# Altium PCB PCB1.PcbDoc
Units mm, origin at the board's own origin, x right, y up, seen from the top; angles counter-clockwise.
Board outline 76.2 x 50.8 mm, 2 copper layers (Top Layer, Bottom Layer), stack 1.534 mm thick; 36 components, 26 nets, 115 pads, 0 vias.
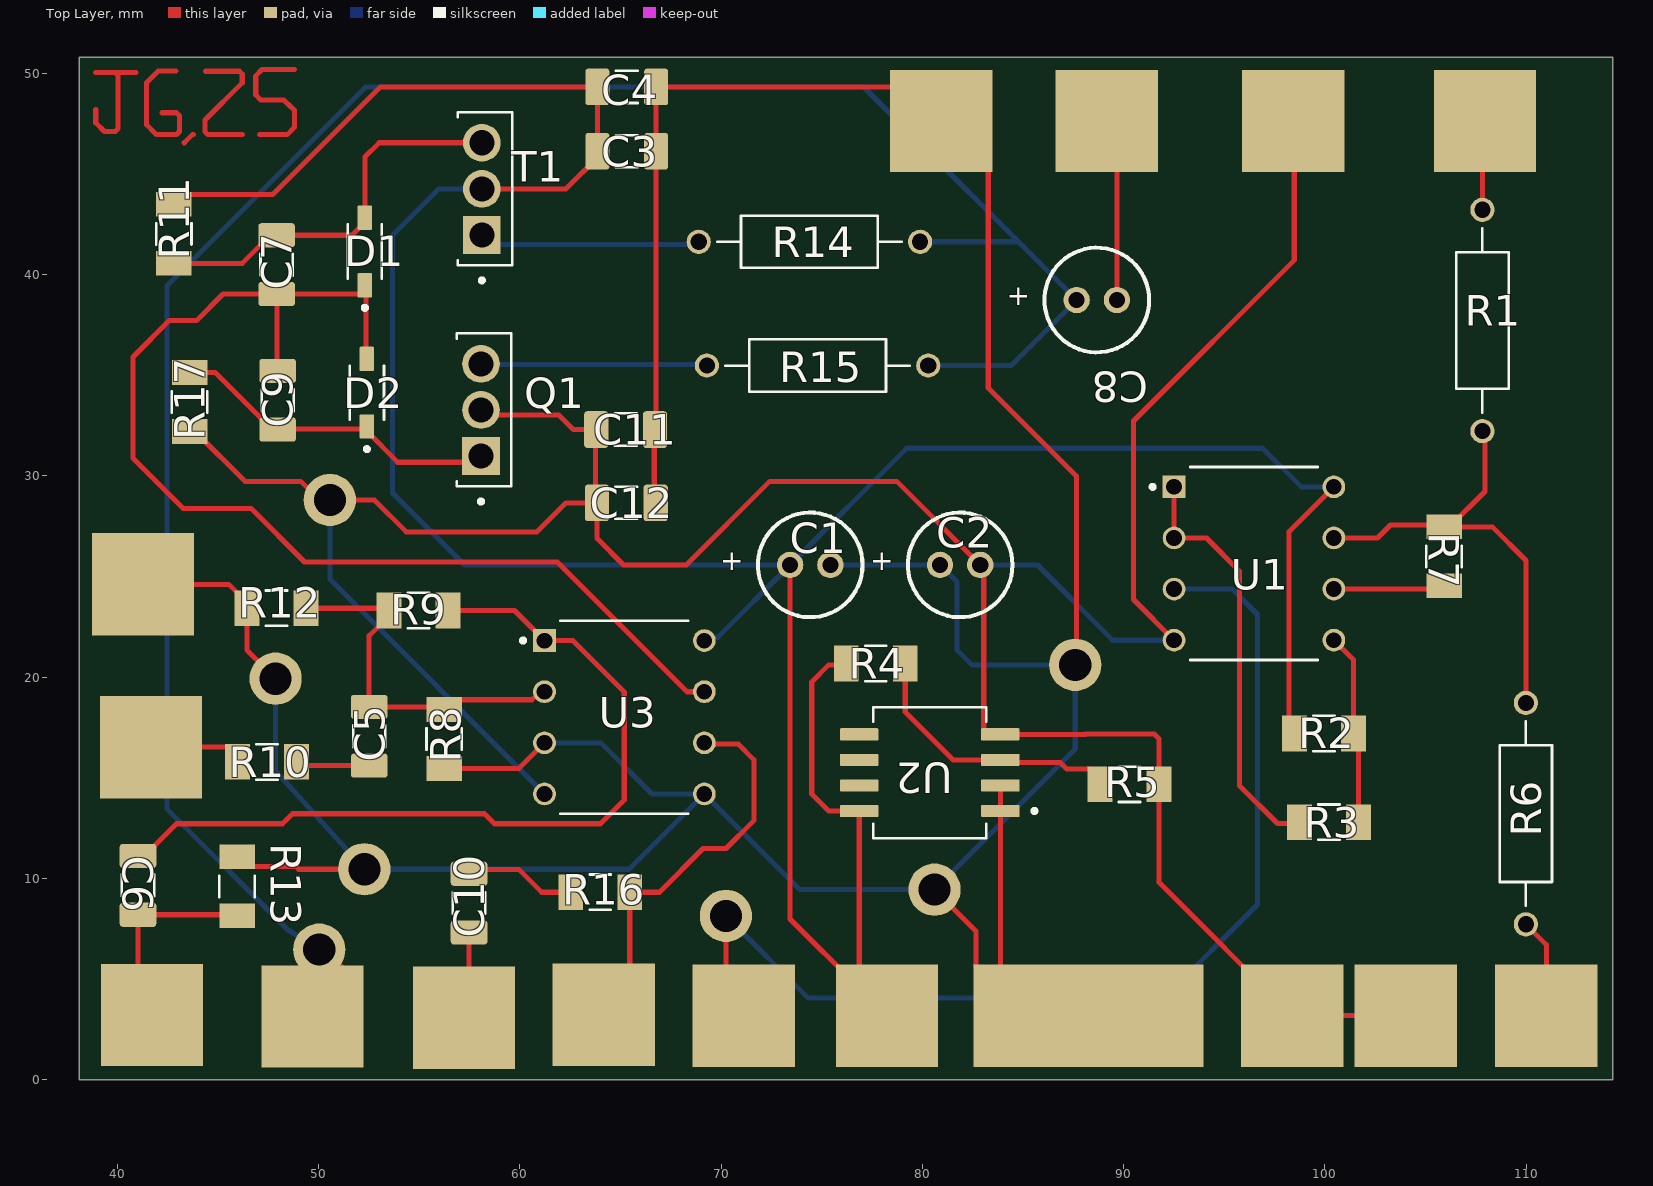
[diagram p0: Top Layer view]
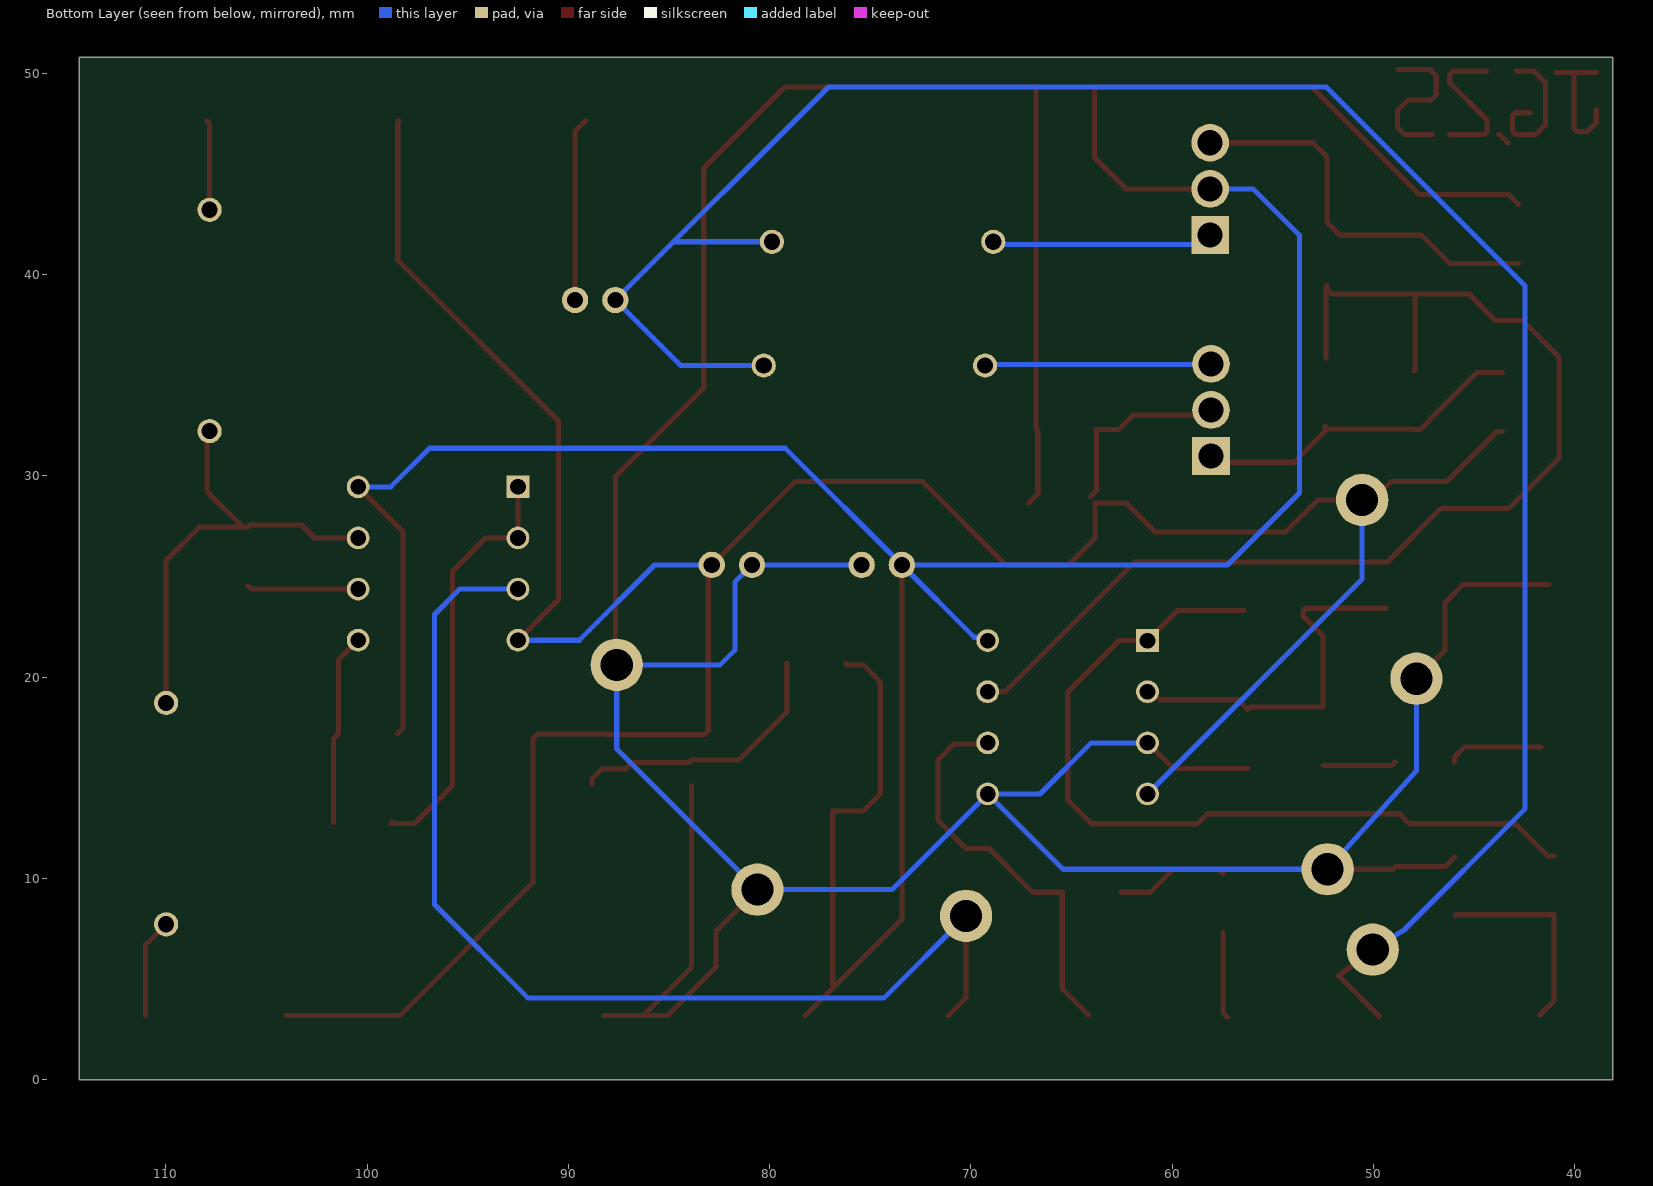
[diagram p1: Bottom Layer view, seen from below]
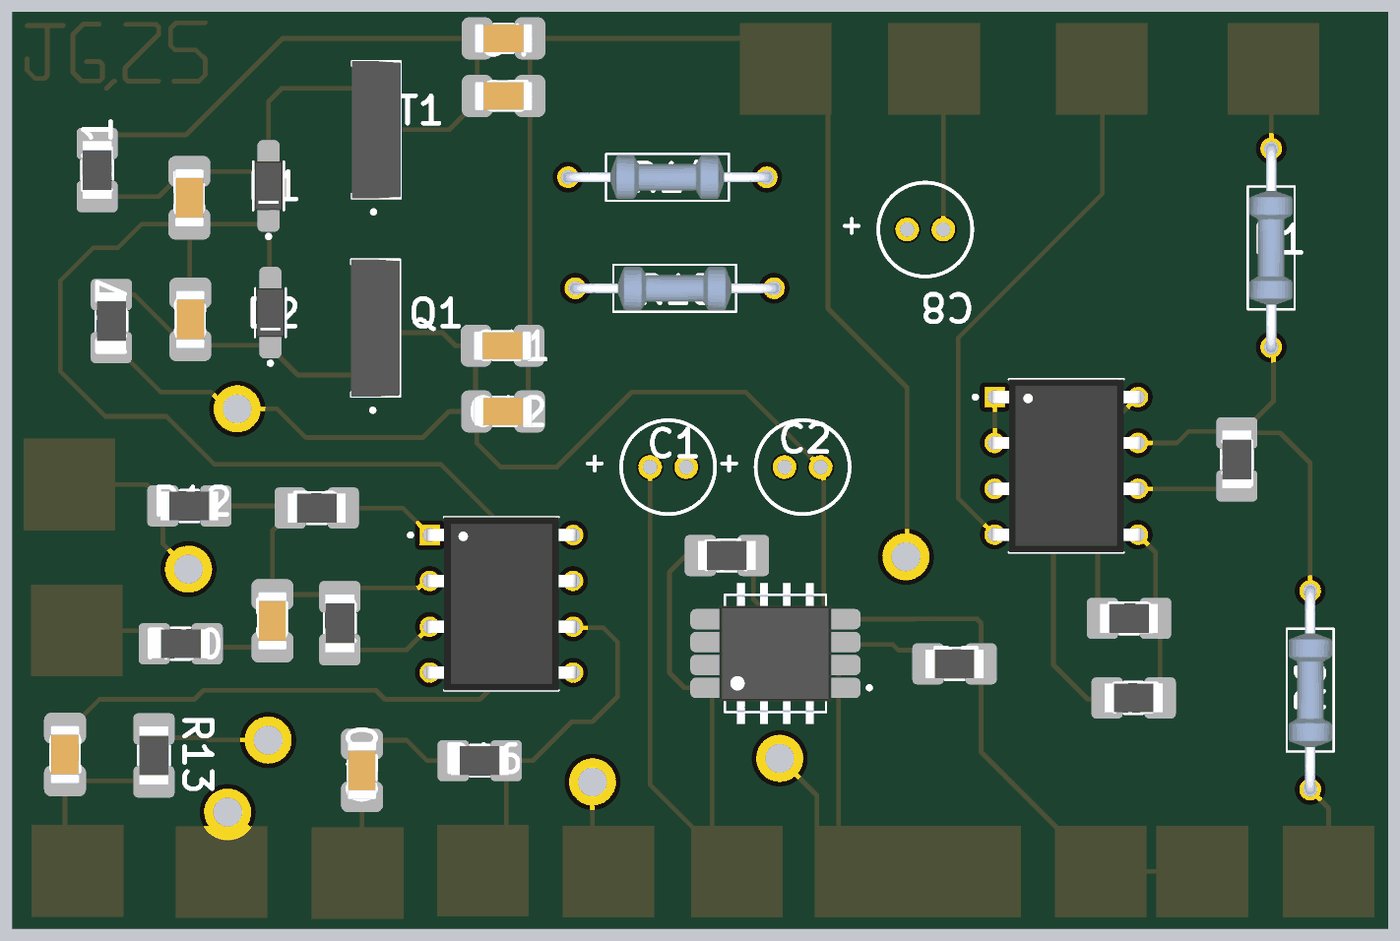
[diagram p2: 3D render of the assembled board from above, using the file's embedded part models]

## Layer stack, top to bottom
Top Solder: solder mask 0.0127, Solder Resist, Dk 3.3
Top Layer: signal copper 0.0178
Dielectric1: core 1.4986, FR-4, Dk 4.3
Bottom Layer: signal copper 0.0178
Bottom Solder: solder mask 0.0127, Solder Resist, Dk 3.3

## Board outline
38.1,0 114.3,0 114.3,50.8 38.1,50.8

## Design rules (kind name [scope] priority, off if disabled: settings)
Clearance [All] p1: gap=0.254 ignorepadtopadclearanceinfootprint=FALSE
DiffPairsRouting [All] p1: maxlimit=0.254 minlimit=0.254 mostfreqgap=0.254 toplayer_minwidth=0.254 toplayer_maxwidth=0.254 toplayer_prefwidth=0.254 bottomlayer_minwidth=0.254 bottomlayer_maxwidth=0.254 bottomlayer_prefwidth=0.254 maxuncoupledlength=12.7
HoleSize [All] p1: absolutevalues=TRUE maxlimit=7.62 minlimit=0.254 maxpercent=80.000 minpercent=20.000
MinimumAnnularRing [All] p1: minimumring=0.254
MinimumSolderMaskSliver [All] p1: minsoldermaskwidth=0.5
PasteMaskExpansion [All] p1: expansion=0.254
PlaneClearance [All] p1: clearance=0.381
PlaneConnect [All] p1: pad.planeconnectstyle=Relief pad.reliefexpansion=0.508 pad.reliefentries=4 pad.reliefconductorwidth=0.254 pad.reliefairgap=0.254 via.planeconnectstyle=Direct via.reliefexpansion=0.508 via.reliefentries=4 via.reliefconductorwidth=0.254 via.reliefairgap=0.254
PolygonConnect [All] p1: thpad.connectstyle=Relief thpad.reliefconductorwidth=0.254 thpad.reliefentries=4 thpad.polygonreliefangle="90 Angle" thpad.airgapwidth=0.254 smdpad.connectstyle=Relief smdpad.reliefconductorwidth=0.254 smdpad.reliefentries=4 smdpad.polygonreliefangle="90 Angle" smdpad.airgapwidth=0.254 via.connectstyle=Direct via.reliefconductorwidth=0.254 via.reliefentries=4 via.polygonreliefangle="90 Angle" via.airgapwidth=0.254
RoutingVias [All] p1: holewidth=0.254 width=0.508 viastyle="Through Hole" minholewidth=0.254 minwidth=0.508 maxholewidth=0.254 maxwidth=0.508
SMDNeckDown [All] p1: percent=100.000
SilkToSolderMaskClearance SilkscreenOverComponentPads [IsPad] p1: minsilkscreentomaskgap=0.254 clearancetoexposedcopper=TRUE
SolderMaskExpansion [All] p1: expansion=0.254 istentingtop=FALSE
SupplyNets "Schematic Supply Nets" [InNet('GND')] p1: voltage=0.000
Width [All] p1: maxlimit=0.508 minlimit=0.254 preferedwidth=0.254
23 further rules are at their usual default settings.

## Components (designator, comment, footprint, x,y, rotation, side; value= is the part's Value field where it differs from the comment)
C1 "WCAP-ATG8_5X11" WCAP-ATG8_5X11(DXL) 74.422,25.574 r180 top value=470uF
C2 "WCAP-ATG8_5X11" WCAP-ATG8_5X11(DXL) 81.871,25.574 r180 top value=470uF
C3 "CL31B106KAHNNNE" CAPC3216X180N 65.307,46.132 r180 top value=100nF
C4 "CL31B106KAHNNNE" CAPC3216X180N 65.307,49.324 r180 top value=22uF
C5 "CL31B106KAHNNNE" CAPC3216X180N 52.507,17.059 r90 top value=10uF
C6 "CL31B106KAHNNNE" CAPC3216X180N 41.021,9.652 r270 top value=1uF
C7 "CL31B106KAHNNNE" CAPC3216X180N 47.907,40.494 r90 top value=22uF
C8 "WCAP-ATG8_5X11" WCAP-ATG8_5X11(DXL) 88.662,38.735 r180 top value=4700uF
C9 "CL31B106KAHNNNE" CAPC3216X180N 47.959,33.755 r90 top value=22uF
C10 "CL31B106KAHNNNE" CAPC3216X180N 57.47,8.771 r90 top value=1uF
C11 "CL31B106KAHNNNE" CAPC3216X180N 65.252,32.3 r0 top value=100nF
C12 "CL31B106KAHNNNE" CAPC3216X180N 65.285,28.658 r0 top value=22uF
D1 "1N4148W-13-F" SOD3715X135N 52.293,41.149 r90 top
D2 "1N4148W-13-F" SOD3715X135N 52.393,34.13 r90 top
Q1 "BD140" "BD139- TO Model" 58.219,33.275 r90 top
R1 "MFR-25FRF52-10K5" RESAD1100W55L680D260 107.823,37.719 r270 top value=0.33
R2 "RMCF1206ZT0R00" RESC3216X70N 99.949,17.195 r180 top value=1k
R3 "RMCF1206ZT0R00" RESC3216X70N 100.203,12.788 r180 top value=1k
R4 "RMCF1206ZT0R00" RESC3216X70N 77.676,20.677 r180 top value=10K
R5 "RMCF1206ZT0R00" RESC3216X70N 90.285,14.674 r180 top value=10k
R6 "MFR-25FRF52-10K5" RESAD1100W55L680D260 109.981,13.217 r90 top value=0.33
R7 "RMCF1206ZT0R00" RESC3216X70N 105.918,26 r270 top value=1k
R8 "RMCF1206ZT0R00" RESC3216X70N 56.235,16.922 r90 top value=560
R9 "RMCF1206ZT0R00" RESC3216X70N 54.959,23.309 r0 top value=10k
R10 "RMCF1206ZT0R00" RESC3216X70N 47.429,15.789 r0 top value=100
R11 "RMCF1206ZT0R00" RESC3216X70N 42.799,42.026 r90 top value=2.4k
R12 "RMCF1206ZT0R00" RESC3216X70N 47.907,23.421 r180 top value=1k
R13 "RMCF1206ZT0R00" RESC3216X70N 45.947,9.602 r270 top value=560
R14 "MFR-25FRF52-10K5" RESAD1100W55L680D260 74.382,41.63 r180 top value=0.33
R15 "MFR-25FRF52-10K5" RESAD1100W55L680D260 74.787,35.48 r0 top value=0.33
R16 "RMCF1206ZT0R00" RESC3216X70N 63.989,9.311 r0 top value=560
R17 "RMCF1206ZT0R00" RESC3216X70N 43.587,33.667 r90 top value=2.4k
T1 "BD139" BD139-TO 58.261,44.26 r90 top
U1 "NE5532P" DIP794W45P254L959H508Q8 96.472,25.643 r0 top
U2 "LM358PSR" SOIC127P780X200-8N 80.363,15.248 r180 top
U3 "NE5532P" DIP794W45P254L959H508Q8 65.19,18.002 r0 top

## Footprints (in the part's own frame and the unit in brackets; to place one, negate y for a bottom-side part, rotate by r counter-clockwise, add the part's x,y. Pads: shape width x height; smd on the part's side, far side on the other; paste and mask are expansions set on the pad)
"BD139- TO Model" [mm]
  round 1.875 hole 1.25: 1(2.29,0.155) 2(0,0.155)
  rect 1.875x1.875 / inner round 1.875 / far side rect 1.875x1.875 hole 1.25: 3(-2.29,0.155)
  silkscreen extent -4.65,-1.35 3.8,1.35, body extent -3.8,-1.35 3.8,1.35, height 13.64
BD139-TO [mm] "Modelt hrough holer"
  round 1.875 hole 1.25: 1(2.29,0.155) 2(0,0.155)
  rect 1.875x1.875 / inner round 1.875 / far side rect 1.875x1.875 hole 1.25: 3(-2.29,0.155)
  silkscreen extent -4.65,-1.35 3.8,1.35, body extent -3.8,-1.35 3.8,1.35, height 13.64
CAPC3216X180N [mm]
  rrect25% 1.2x1.82 smd: 1(-1.46,0) 2(1.46,0)
  silkscreen extent -0.54,-0.8 0.54,0.8, body extent -1.6,-0.8 1.6,0.8, height 1.8
DIP794W45P254L959H508Q8 [mm]
  rect 1.13x1.13 / inner round 1.13 / far side rect 1.13x1.13 hole 0.78: 1(-3.97,3.81)
  round 1.13 hole 0.78: 2(-3.97,1.27) 3(-3.97,-1.27) 4(-3.97,-3.81) 5(3.97,-3.81) 6(3.97,-1.27) 7(3.97,1.27) 8(3.97,3.81)
  silkscreen extent -5.13,-4.79 3.17,4.79, body extent -4.15,-4.79 4.15,4.79, height 5.08
RESAD1100W55L680D260 [mm]
  round 1.2 hole 0.8: 1(-5.5,0) 2(5.5,0)
  silkscreen extent -4.58,-1.3 4.58,1.3, body extent -5.77,-1.2 5.77,1.2, height 2.4
RESC3216X70N [mm]
  rect 1.23x1.77 smd: 1(-1.466,0) 2(1.466,0)
  silkscreen extent -0.53,-0.88 0.53,0.88, body extent -1.6,-0.8 1.6,0.8, height 0.7
SOD3715X135N [mm]
  rrect18% 1.21x0.73 smd: A(1.68,0) C(-1.68,0)
  silkscreen extent -2.9,-0.85 1.35,0.85, body extent -1.83,-0.77 1.83,0.77, height 0.74
SOIC127P780X200-8N [mm]
  rrect15% 1.9x0.61 smd: 1(-3.505,1.905) 2(-3.505,0.635) 3(-3.505,-0.635) 4(-3.505,-1.905) 5(3.505,-1.905) 6(3.505,-0.635) 7(3.505,0.635) 8(3.505,1.905)
  silkscreen extent -5.3,-3.25 2.8,3.25, body extent -3.9,-3.1 3.9,3.1, height 2
WCAP-ATG8_5X11(DXL) [mm]
  round 1.308 hole 0.8 mask+0.102: 1(1,0) 2(-1,0)
  silkscreen extent -2.6,-2.6 2.6,2.6

## Part data
C1 C2 C8: library part CMP-001-00083-1, "CAP ALUM 33UF 20% 35V RADIAL TH", Case/Package="Radial Wurth Electronics", Check_prices=https://www.snapeda.com/parts/860010572004/W%25C3%25BCrth+Elektronik+Midcom/view-part/?ref=eda, Component Type=Standard, Design Item ID=WCAP-ATG8_5X11, MF="WÃ¼rth Elektronik", MP=860010572004, Pins=2, SnapEDA_Link=https://www.snapeda.com/parts/860010572004/W%25C3%25BCrth+Elektronik+Midcom/view-part/?ref=snap, Source=WCAP-ATG8_5X11.SchLib
C3 C4 C5 C6 C7 C9 C10 C11 C12: library part CMP-001-00084-1, "CL31 Series 10 uF 25 V Â±10 % Tolerance X7R SMT Multilayer Ceramic Capacitor", Case/Package="SMD-2 Samsung", Check_prices=https://www.snapeda.com/parts/CL31B106KAHNNNE/Samsung/view-part/?ref=eda, Component Type=Standard, Design Item ID=CL31B106KAHNNNE, MF="Samsung Electro-Mechanics", MP=CL31B106KAHNNNE, Pins=2, SnapEDA_Link=https://www.snapeda.com/parts/CL31B106KAHNNNE/Samsung/view-part/?ref=snap, Source=CL31B106KAHNNNE.SchLib
D1 D2: library part CMP-004-00031-1, "Diode Switching 100V 0.15A 2Pin SOD123", Case/Package="SOD-123 Fairchild Semiconductor", Check_prices=https://www.snapeda.com/parts/1N4148W-13-F/Diodes+Inc./view-part/?ref=eda, Component Type=Standard, Design Item ID=1N4148W-13-F, MF="Diodes Inc.", MP=1N4148W-13-F, Pins=2, SnapEDA_Link=https://www.snapeda.com/parts/1N4148W-13-F/Diodes+Inc./view-part/?ref=snap, Source=1N4148W-13-F.SchLib
Q1: library part CMP-019-000000-2, "Bipolar (BJT) Transistor PNP 80 V 1.5 A - 1.25 W Through Hole TO-126-3", Package="TO-225-3 ON Semiconductor", Check_prices=https://www.snapeda.com/parts/BD140/Onsemi/view-part/?ref=eda, Component Type=Standard, Design Item ID=BD140, MF="ON Semiconductor", MP=BD140, Pin Count=3, SnapEDA_Link=https://www.snapeda.com/parts/BD140/Onsemi/view-part/?ref=snap, Source=BD140.SchLib
R1 R6 R14 R15: library part CMP-009-00179-1, "10.5 kOhms Â±1% 0.25W, 1/4W Through Hole Resistor Axial - Metal Film", Case/Package="RADIAL-2 YAGEO", Check_prices=https://www.snapeda.com/parts/MFR-25FRF52-10K5/Yageo/view-part/?ref=eda, Component Type=Standard, Design Item ID=MFR-25FRF52-10K5, MF=Yageo, MP=MFR-25FRF52-10K5, Pins=2, SnapEDA_Link=https://www.snapeda.com/parts/MFR-25FRF52-10K5/Yageo/view-part/?ref=snap, Source=MFR-25FRF52-10K5.SchLib
R2 R3 R4 R5 R7 R8 R9 R10 R11 R12 R13 R16 R17: library part CMP-009-00177-1, "0 Ohms Jumper 0.25W, 1/4W Chip Resistor 1206 (3216 Metric) Automotive AEC-Q200 Thick Film", Case/Package="3216 Stackpole", Check_prices=https://www.snapeda.com/parts/RMCF1206ZT0R00/Stackpole+Electronics/view-part/?ref=eda, Component Type=Standard, Design Item ID=RMCF1206ZT0R00, MF="Stackpole Electronics Inc", MP=RMCF1206ZT0R00, Pins=2, SnapEDA_Link=https://www.snapeda.com/parts/RMCF1206ZT0R00/Stackpole+Electronics/view-part/?ref=snap, Source=RMCF1206ZT0R00.SchLib
T1: library part CMP-012-00001-3, "Bipolar (BJT) Transistor NPN 80 V 1.5 A - 1.25 W Through Hole TO-126-3", Case/Package="TO-126 STMicroelectronics", Check_prices=https://www.snapeda.com/parts/BD139/Onsemi/view-part/?ref=eda, Component Type=Standard, Design Item ID=BD139, MF=ON, MP=BD139, Pins=3, SnapEDA_Link=https://www.snapeda.com/parts/BD139/Onsemi/view-part/?ref=snap, Source=BD139.SchLib
U1 U3: library part CMP-014-00003-1, "Dual, 30-V, 10-MHz, low-noise operational amplifier for audio applications", Case/Package="PDIP-8 Texas", Check_prices=https://www.snapeda.com/parts/NE5532P/Texas+Instruments/view-part/?ref=eda, Component Type=Standard, Design Item ID=NE5532P, MF="Texas Instruments", MP=NE5532P, Pins=8, SnapEDA_Link=https://www.snapeda.com/parts/NE5532P/Texas+Instruments/view-part/?ref=snap, Source=NE5532P.SchLib
U2: library part CMP-014-00004-1, "Dual, 30-V, 700-kHz operational amplifier", Case/Package="SOP-8 Texas Instruments", Check_prices=https://www.snapeda.com/parts/LM358PSR/Texas+Instruments/view-part/?ref=eda, Component Type=Standard, Design Item ID=LM358PSR, MF="Texas Instruments", MP=LM358PSR, Pins=8, SnapEDA_Link=https://www.snapeda.com/parts/LM358PSR/Texas+Instruments/view-part/?ref=snap, Source=LM358PSR.SchLib

## Free pads (board coordinates)
  round 2.6 hole 1.6: 5(47.856,19.921) 5(50.028,6.461) 5(50.555,28.802) 5(52.27,10.451) 5(70.234,8.133) 5(80.6,9.438) 5(87.591,20.607)
  rect 5.08x5.08 smd paste-2539.97 mask+0.254: ""(41.262,24.608) ""(41.664,16.519) ""(41.713,3.205) ""(49.694,3.135) ""(57.223,3.078) ""(64.163,3.222) ""(71.122,3.175) ""(78.232,3.175) ""(80.937,47.625) ""(89.154,47.625) ""(98.377,3.175) ""(98.425,47.625) ""(104.013,3.175) ""(107.95,47.625) ""(110.998,3.175)
  rect 11.43x5.08 smd paste-2539.97 mask+0.254: ""(88.25,3.175)

## Nets (pads, with @x,y where several pads share a name; then routed paths per layer and width w, separated by ;. In a path a pad name is that pad's centre, name@x,y a point inside that pad or via, vN(x,y) a via of type N, cw(c..) or ccw(c..) an arc to the next point about the centre after c; other vN are vias at no path point)
GND: C1.2 C2.1 C3.1 C4.1 C11.2 C12.2 pad.5@47.856,19.921 pad.5@52.27,10.451 pad.5@80.6,9.438 pad.5@87.591,20.607 pad.@41.262,24.608 pad.@80.937,47.625 pad.@88.25,3.175 R8.1 R12.2 R13.1 U2.1 U2.2 U3.3 U3.5 | length 192
  Top Layer w0.254: pad.@41.262,24.608 45.524,24.608 46.441,23.691 R12.2 46.441,21.336 pad.5@47.856,19.921 ; R13.1 46.435,10.58 48.881,10.58 49.011,10.451 pad.5@52.27,10.451 ; R8.1 59.944,15.456 U3.3 ; C12.2@67.105,28.658 66.634,29.129 66.634,29.291 66.673,29.33 66.673,32.261 66.767,32.355 C3.1 C4.1 79.238,49.324 80.937,47.625 83.271,45.291 83.271,34.37 87.659,29.982 87.659,21.98 ; pad.5@80.6,9.438 82.662,7.376 82.662,5.588 85.075,3.175 pad.@86.281,3.175 ; U2.2 U2.1 83.868,5.588 pad.@86.281,3.175 ; pad.@88.25,3.175 pad.@86.281,3.175
  Bottom Layer w0.254: pad.5@47.856,19.921 47.856,15.338 52.27,10.451 65.419,10.451 U3.5 ; U3.3 64.014,16.732 66.554,14.192 U3.5 ; C1.2 C2.1 81.724,24.721 81.724,21.336 82.453,20.607 87.591,20.607 87.591,16.429 pad.5@80.735,9.573 ; pad.5@80.6,9.438 73.914,9.438 U3.5
Gpot-leg1: pad.@64.163,3.222 R16.2 U3.6 | length 19.9
  Top Layer w0.254: pad.@64.163,3.222 65.455,4.514 R16.2 66.933,9.311 69.099,11.477 70.234,11.477 71.622,12.865 71.622,15.892 70.845,16.669 U3.6@69.328,16.669
Gpot-leg2: C8.1 pad.5@50.028,6.461 pad.@49.694,3.135 R14.1 R15.2 | length 108.6
  Top Layer w0.254: pad.@49.694,3.135 51.717,5.159 pad.5@50.028,6.461
  Bottom Layer w0.254: pad.5@50.028,6.461 48.501,7.413 42.452,13.462 42.452,39.437 52.339,49.324 77.073,49.324 C8.1 84.407,35.48 R15.2 ; R14.1 84.767,41.63
Laser1+: pad.@107.95,47.625 R1.1 | length 4.5
  Top Layer w0.254: R1.1 107.823,47.498 pad.@107.95,47.625
Laser2+: pad.@110.998,3.175 R6.1 | length 5
  Top Layer w0.254: R6.1 110.998,6.7 pad.@110.998,3.175
NetC5_1: C5.1 R10.2 | length 3.7
  Top Layer w0.254: R10.2 49.085,15.599 C5.1
NetC5_2: C5.2 R8.2 R9.1 R12.1 U3.2 | length 18.5
  Top Layer w0.254: R12.1 53.381,23.421 R9.1 53.493,23.039 52.507,22.053 C5.2 56.104,18.519 R8.2 56.723,18.876 60.587,18.876 60.983,19.272 U3.2
NetC6_1: C6.1 R9.2 U3.1 | length 41.5
  Top Layer w0.254: C6.1 41.331,11.112 42.932,12.713 48.201,12.713 48.695,13.207 58.244,13.207 58.738,12.713 64.006,12.713 65.182,13.889 65.182,19.253 62.623,21.812 U3.1 59.723,23.309 R9.2
NetC7_1: C7.1 C9.2 D1.C D2.A U3.7 | length 58.8
  Top Layer w0.254: C9.2 47.933,35.241 47.933,39.008 C7.1 ; D2.A@52.343,35.86 52.343,39.419 D1.C 52.293,39.272 52.055,39.034 C7.1 ; U3.7 68.299,19.272 61.85,25.721 49.293,25.721 46.631,28.383 43.263,28.383 40.767,30.879 40.767,35.907 42.579,37.719 43.934,37.719 45.249,39.034 C7.1
NetC7_2: C7.2 D1.A R11.1 T1.1 | length 18.8
  Top Layer w0.254: R11.1 46.203,40.56 47.597,41.954 C7.2 51.658,41.954 52.293,42.589 D1.A 52.293,45.836 53.006,46.55 T1.1@57.238,46.55
NetC9_1: C9.1 D2.C Q1.3 R17.2 | length 16.7
  Top Layer w0.254: R17.2 44.853,35.133 47.19,32.796 47.19,32.766 47.661,32.295 C9.1 47.992,32.328 52.27,32.328 D2.C 52.393,32.21 53.929,30.674 57.754,30.674 Q1.3
NetC10_2: C10.2 R16.1 | length 5.6
  Top Layer w0.254: C10.2 57.685,10.446 59.944,10.446 61.079,9.311 R16.1
NetQ1_1: Q1.1 R15.1 | length 11.3
  Bottom Layer w0.254: Q1.1 58.106,35.522 69.245,35.522 R15.1
NetR1_2: R1.2 R6.2 R7.1 U1.7 | length 23.4
  Top Layer w0.254: U1.7 102.611,26.913 103.251,27.553 105.831,27.553 R7.1 ; R1.2 107.95,32.092 107.95,29.228 106.188,27.466 R7.1 ; R6.2 R6.2 109.982,25.794 108.31,27.466 R7.1
NetR2_1: R2.1 R3.1 U1.5 | length 9.6
  Top Layer w0.254: U1.5 101.415,20.86 R2.1 101.669,16.941 R3.1
NetR3_2: R3.2 U1.1 U1.2 | length 21.1
  Top Layer w0.254: U1.1 U1.2 94.107,26.913 95.758,25.262 95.758,14.605 97.642,12.721 98.804,12.721 R3.2
NetR4_1: R4.1 R5.2 U2.3 | length 13.7
  Top Layer w0.254: R4.1 79.142,18.269 81.528,15.883 U2.3 83.995,15.756 86.844,15.756 87.168,15.432 88.331,15.432 88.819,14.944 R5.2
NetR7_2: R7.2 U1.6 | length 5.5
  Top Layer w0.254: U1.6 105.757,24.373 R7.2
NetR14_2: R14.2 T1.3 | length 11
  Bottom Layer w0.254: T1.3 58.58,41.496 68.749,41.496 R14.2
PhotoSig: C6.2 pad.@41.713,3.205 R13.2 | length 10.2
  Top Layer w0.254: pad.@41.713,3.205 41.021,3.897 C6.2 45.891,8.192 R13.2
"Solar Cell +": pad.@41.664,16.519 R10.1 | length 4.7
  Top Layer w0.254: pad.@41.664,16.519 45.475,16.519 45.963,16.031 R10.1
Speaker-Leg1: C8.2 pad.@89.154,47.625 | length 9.1
  Top Layer w0.254: pad.@89.154,47.625 89.662,47.117 C8.2
Vcc+: C1.1 C3.2 C4.2 pad.@78.232,3.175 R2.2 R4.2 R11.2 T1.2 U1.8 U2.8 U3.8 | length 165.7
  Top Layer w0.254: R11.2 43.287,43.98 47.712,43.98 53.057,49.324 C4.2 C3.2 63.847,45.822 62.285,44.26 T1.2 ; C1.1 73.422,7.985 pad.@76.858,4.549 ; R4.2 76.14,20.607 75.345,20.607 74.495,19.758 74.495,14.192 75.344,13.343 U2.8 pad.@76.858,4.549 ; pad.@78.232,3.175 pad.@76.858,4.549 ; R2.2 98.219,17.459 98.219,27.23 U1.8
  Bottom Layer w0.254: T1.2 55.973,44.26 53.667,41.954 53.667,29.145 57.238,25.574 C1.1 ; U3.8 69.328,21.98 69.828,21.98 C1.1 ; U1.8 98.817,29.453 96.901,31.369 79.217,31.369 C1.1
Vcc-: C2.2 C11.1 C12.1 pad.5@50.555,28.802 pad.@98.377,3.175 pad.@98.425,47.625 pad.@104.013,3.175 Q1.2 R5.1 R17.1 U1.4 U2.4 U3.4 | length 156.7
  Top Layer w0.254: R17.1 43.857,32.201 46.331,29.727 49.103,29.727 50.028,28.802 50.555,28.802 52.763,28.802 54.348,27.217 60.845,27.217 62.285,28.658 C12.1 63.825,26.893 65.144,25.574 68.262,25.574 72.415,29.727 78.718,29.727 C2.2 83.045,25.4 83.045,17.331 83.223,17.153 U2.4 88.093,17.153 88.115,17.175 91.517,17.175 91.751,16.941 R5.1 91.751,9.801 98.377,3.175 pad.@104.013,3.175 ; Q1.2 58.319,33.02 61.931,33.02 62.651,32.3 C11.1 ; C12.1@63.714,29.291 C12.1@64.037,28.968 ; C12.1@63.753,29.33 C11.1@63.753,32.261 ; U1.4 90.48,23.855 90.48,32.722 98.473,40.715 98.473,47.577 pad.@98.425,47.625
  Bottom Layer w0.254: pad.5@50.555,28.802 50.555,24.857 U3.4 ; C2.2 85.716,25.574 89.457,21.833 U1.4
Vpot-leg1: pad.5@70.234,8.133 pad.@71.122,3.175 U1.3 | length 54.4
  Top Layer w0.254: pad.5@70.234,8.133 70.234,4.063 pad.@71.122,3.175
  Bottom Layer w0.254: pad.5@70.234,8.133 74.303,4.063 92.015,4.063 96.647,8.695 96.647,23.114 95.388,24.373 U1.3
Vpot-leg2: C10.1 pad.@57.223,3.078 | length 4.3
  Top Layer w0.254: pad.@57.223,3.078 57.47,3.325 C10.1
pads on no net: U2.5 U2.6 U2.7
copper on no net: | length 30.3
  Top Layer w0.254: 38.921,48.198 38.921,47.54 39.35,47.11 39.52,47.11 39.887,47.11 40.036,47.259 40.036,49.885 39.887,50.034 ; 38.921,50.034 39.013,50.034 39.152,50.034 39.199,50.034 39.887,50.034 ; 40.926,50.034 39.887,50.034 ; 42.207,48.04 42.938,48.04 43.086,47.892 43.086,47.108 42.938,46.959 41.937,46.959 41.868,47.028 41.45,47.446 41.45,49.539 42.025,50.114 42.91,50.114 ; 43.319,46.55 43.721,46.951 43.768,46.951 ; 44.383,50.106 46.054,50.106 46.203,49.957 46.203,49.534 44.345,47.675 44.345,47.1 44.494,46.951 46.203,46.951 ; 47.053,46.951 48.431,46.951 48.79,47.31 48.79,48.175 48.641,48.323 48.618,48.323 48.261,48.68 47.502,48.68 47.122,48.68 46.872,48.93 46.872,49.106 46.872,49.876 47.186,50.189 48.79,50.189

## Text inside footprints (layer, text, board x,y; h text height)
C1: Top Overlay "+" at 71.122,26.174 h1.02 r180; Top Assembly "+" at 71.122,26.174 h1.02 r180
C2: Top Overlay "+" at 78.571,26.174 h1.02 r180; Top Assembly "+" at 78.571,26.174 h1.02 r180
C8: Top Overlay "+" at 85.362,39.335 h1.02 r180; Top Assembly "+" at 85.362,39.335 h1.02 r180